# Allegro board FPMemory_1.brd
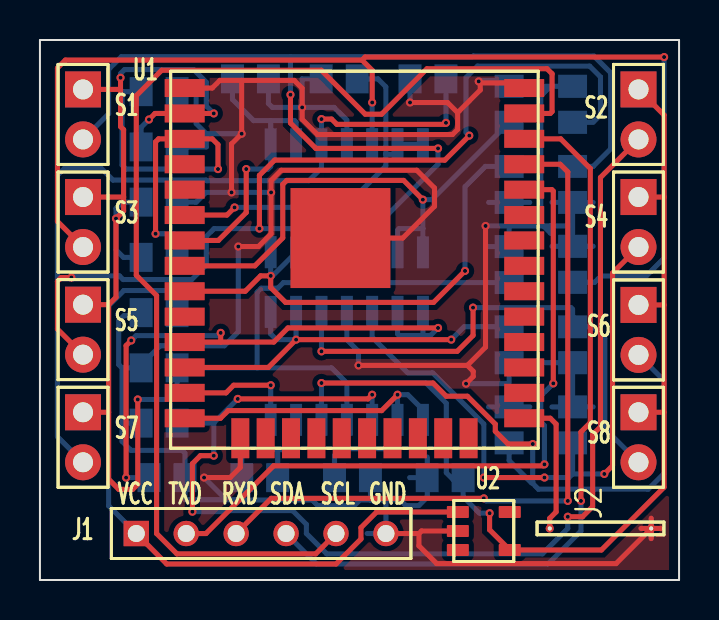
[diagram p0: board, top side]
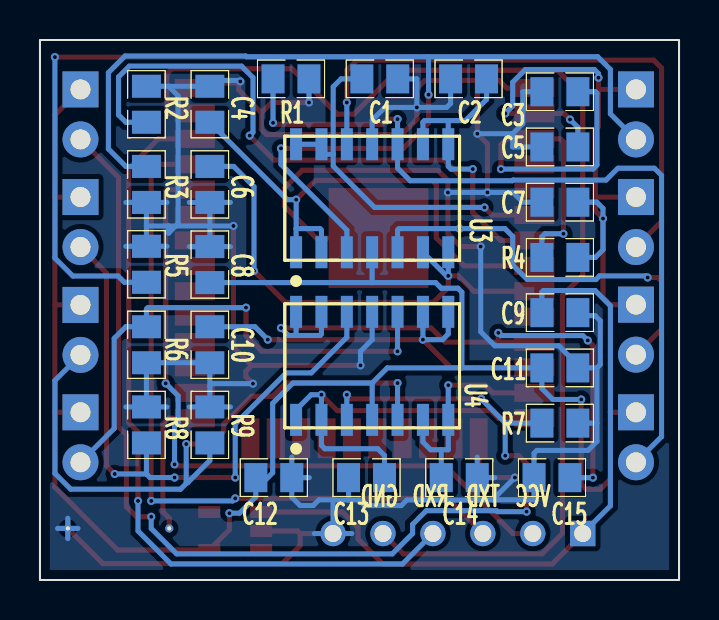
[diagram p1: board, bottom side, seen from below]

Outline 32 x 27 mm; copper layers: TOP, BOTTOM. Coordinates in mm from the lower left corner of the outline.
Outline path: rectangle 0,0 32,27

## Design rules (mm)
constraint set DEFAULT: min track width 0.254, pair gap 0.254

## Placement (name value [footprint] x y rotation side)
C1  0.1uF  [CAP0805]  14.98 25.06 0 bottom
C2  0.1uF  [CAP0805]  10.54 25.06 0 bottom
C3  0.1uF  [CAP0805]  5.97 24.42 180 bottom
C4  0.1uF  [CAP0805]  23.49 23.79 270 bottom
C5  10uF  [CAP0805]  5.97 21.65 180 bottom
C6  0.1uF  [CAP0805]  23.49 19.78 270 bottom
C7  0.1uF  [CAP0805]  5.97 18.89 180 bottom
C8  0.1uF  [CAP0805]  23.49 15.77 90 bottom
C9  1uF  [CAP0805]  5.97 13.37 180 bottom
C10  0.1uF  [CAP0805]  23.49 11.76 270 bottom
C11  2.2uF  [CAP0805]  5.97 10.61 180 bottom
C12  0.1uF  [CAP0805]  20.29 5.12 180 bottom
C13  0.1uF  [CAP0805]  15.65 5.12 180 bottom
C14  0.1uF  [CAP0805]  11 5.12 180 bottom
C15  0.1uF  [CAP0805]  6.36 5.12 180 bottom
J1  UART  [SIP-6]  4.82 2.32 90 top
J2  CON2  [SIP-2S]  25.52 2.58 90 top
R1  50k  [RES0805]  19.43 25.06 180 bottom
R2  50k  [RES0805]  26.67 23.79 270 bottom
R3  50k  [RES0805]  26.67 19.78 270 bottom
R4  10k  [RES0805]  5.97 16.13 180 bottom
R5  50k  [RES0805]  26.67 15.79 90 bottom
R6  50k  [RES0805]  26.67 11.76 270 bottom
R7  50k  [RES0805]  5.97 7.84 180 bottom
R8  50k  [RES0805]  26.67 7.75 90 bottom
R9  50k  [RES0805]  23.49 7.75 270 bottom
S1  IMS-C20B  [SIP-2]  2.16 24.53 0 top
S2  IMS-C20B  [SIP-2]  29.97 24.53 0 top
S3  IMS-C20B  [SIP-2]  2.16 19.15 0 top
S4  IMS-C20B  [SIP-2]  29.97 19.15 0 top
S5  IMS-C20B  [SIP-2]  2.16 13.77 0 top
S6  IMS-C20B  [SIP-2]  29.97 13.75 0 top
S7  IMS-C20B  [SIP-2]  2.16 8.39 0 top
S8  IMS-C20B  [SIP-2]  29.97 8.39 0 top
U1  ESP32  [SMD-38]  15.75 19.09 0 top
U2  TPS70933  [SOT-23]  22.22 2.45 0 top
U3  LM324  [SOIC-14]  15.36 19.09 90 bottom
U4  LM324  [SOIC-14]  15.36 10.71 90 bottom

## Library data of the parts
C1-C15 = CAP NP
J1 = UART
J2 = CON2
R1-R9 = R
S1-S8 = IMS-C20B
U1 = ESP32
U2 = TPS70933
U3 U4 = LM324

## Footprints (pads in the part's own frame, mm; a bottom-side part is the same pattern mirrored in y, then rotated)
CAP0805
  rect 1.15x1.45 smd: 1(-0.9,0) 2(0.9,0)
RES0805
  rect 1.15x1.45 smd: 1(-0.9,0) 2(0.9,0)
SIP-2
  rect 1.8x1.8 hole 1: 1(0,0)
  round 1.8 hole 1: 2(0,-2.5)
SIP-2S
  round 0.406 hole 0.203: 1(0,0) 2(0,-5.08)
SIP-6
  rect 1.27x1.27 hole 0.85: 1(0,0)
  round 1.27 hole 0.85: 2(0,-2.5) 3(0,-5) 4(0,-7.5) 5(0,-10) 6(0,-12.5)
SMD-38
  rect 2x0.9 smd: 1(-8.5,5.51) 2(-8.5,4.24) 3(-8.5,2.97) 4(-8.5,1.7) 5(-8.5,0.43) 6(-8.5,-0.84) 7(-8.5,-2.11) 8(-8.5,-3.38) 9(-8.5,-4.65) 10(-8.5,-5.92) 11(-8.5,-7.19) 12(-8.5,-8.46) 13(-8.5,-9.73) 14(-8.5,-11) 25(8.5,-11) 26(8.5,-9.73) 27(8.5,-8.46) 28(8.5,-7.19) 29(8.5,-5.92) 30(8.5,-4.65) 31(8.5,-3.38) 32(8.5,-2.11) 33(8.5,-0.84) 34(8.5,0.43) 35(8.5,1.7) 36(8.5,2.97) 37(8.5,4.24) 38(8.5,5.51)
  rect 0.9x2 smd: 15(-5.715,-12) 16(-4.445,-12) 17(-3.175,-12) 18(-1.905,-12) 19(-0.635,-12) 20(0.635,-12) 21(1.905,-12) 22(3.175,-12) 23(4.445,-12) 24(5.715,-12)
  rect 5x5 smd: 39(-0.7,-1.99)
SOIC-14
  rect 1.6x0.6 smd: 1(-2.7,3.81) 2(-2.7,2.54) 3(-2.7,1.27) 4(-2.7,0) 5(-2.7,-1.27) 6(-2.7,-2.54) 7(-2.7,-3.81) 8(2.7,-3.81) 9(2.7,-2.54) 10(2.7,-1.27) 11(2.7,0) 12(2.7,1.27) 13(2.7,2.54) 14(2.7,3.81)
SOT-23
  rrect 1.1x0.6 smd: 1(-1.3,0.95) 2(-1.3,0) 3(-1.3,-0.95) 4(1.3,-0.95) 5(1.3,0.95)

## Nets
GND: C1.1 C2.2 C3.1 C4.1 C5.1 C6.2 C7.1 C8.2 C9.2 C10.2 C11.2 C12.2 C13.1 C14.2 C15.1 J1.6 J2.2(P2) R1.2 R2.1 R3.2 R5.2 R6.2 R7.2 R8.2 R9.1 U1.1 U1.15 U1.38 U1.39 U2.2 U3.11 U4.11
VCC: C9.1 J1.1(VCC) U2.1
VDD33: C5.2 C7.2 C8.1 C11.1 C12.1 R4.2 S1.1 S2.1 S3.1 S4.1 S5.1 S6.1 S7.1 S8.1 U1.2 U2.4(OUT) U3.4(VCC) U4.4(VCC)
ADC1_CH4: C4.2 U1.8 U3.1 U3.2
ADC1_CH5: C6.1 U1.9 U3.6 U3.7
ADC1_CH6: C1.2 U1.6 U3.13 U3.14
ADC1_CH7: C2.1 U1.7 U3.8 U3.9
ADC2_CH5: C13.2 U1.14 U4.1 U4.2
ADC2_CH6: C14.1 U1.13 U4.6 U4.7
ADC2_CH7: C10.1 U1.12 U4.8 U4.9
ADC2_CH9: C15.2 U1.11 U4.13 U4.14
RXD: J1.3 U1.35(TXD0)
SCL: J1.5 U1.37
SDA: J1.4 U1.36
TXD: J1.2 U1.34
N01133: R3.1 S1.2(-) U3.3
N02072: R2.2 S5.2(-) U3.5
N02980: R5.1 S3.2(-) U3.12
N03024: R1.1 S7.2(-) U3.10
N05883: C3.2 R4.1 U1.3
N05919: J2.1 U1.25
N44841: R7.1 S2.2(-) U4.3
N44913: R8.1 S4.2(-) U4.12
N45127: R9.2 S6.2(-) U4.5
N45143: R6.1 S8.2(-) U4.10

Pads without a net: U1 4 5 10 16 17 18 19 20 21 22 23 24 26 27 28 29 30 31 32 33; U2 3 5

## Via types
v1: diameter 0.406, hole 0.203, TOP to BOTTOM, 58 vias

## Routing (per net, layer and track width the routed paths; a pad name or vN(x,y) marks a point on that pad's centre or on a via; arc(x,y) is an arc through that point)
GND: length 206.7
  TOP w0.254: U2.2 19.1,2.45 18.98,2.32 ; 22.05,24.85 22.05,24.5 20.91,23.37 ; 22.05,24.85 v1(21.97,24.93) ; 22.05,24.85 23.99,24.85 U1.38 ; v1(21.33,9.82) 21.69,10.18 21.69,10.43 21.4,10.73 ; U1.15 10.03,5.63 9.52,5.12 v1(8.22,5.12) ; v1(15.95,10.73) 21.4,10.73 ; 21.4,10.73 22.31,11.64 v1(22.31,17.7) ; v1(9.93,16.67) 10.94,16.67 11.57,17.31 v1(11.57,19.38) 11.57,19.98 12.08,20.49 18.87,20.49 19.76,19.6 19.76,18.69 18.17,17.1 U1.39 ; 10.1,24.98 9.01,24.98 8.63,24.6 U1.1 ; 10.1,24.98 12.73,24.98 13.13,24.58 v1(13.13,23.63) 13.13,23.04 13.89,22.27 20.66,22.27 20.91,22.53 20.91,23.37 ; 10.1,24.98 v1(10.1,22.31) 9.59,21.81 v1(9.59,19.38) ; J2.2 28.85,0.82 19.86,0.82 18.98,1.71 18.98,2.32 ; J2.2 30.6,2.07 ; J2.2 30.6,3.09 ; J2.2 31.11,2.58 ; J2.2 30.1,2.58 ; v1(18.53,23.87) 20.41,23.87 20.91,23.37 ; 18.98,2.32 J1.6
  BOTTOM w0.254: R9.1 24.52,8.65 ; R9.1 23.49,9.69 ; R9.1 22.46,8.65 ; C14.2 10.1,6.15 ; C14.2 10.1,4.09 10.03,4.01 ; C14.2 9.22,5.12 ; 16.38,2.32 J1.6 ; J1.6 17.32,4.01 ; J1.6 18.26,2.32 ; C13.1 16.55,4 ; 16.55,4 17.32,4 17.32,4.01 ; 16.55,4 16.02,4 15.74,3.72 13.91,3.72 13.63,4 10.04,4 10.03,4.01 ; 17.32,4.01 18.03,4.01 18.32,3.72 18.97,3.72 19.39,4.14 C12.2 ; R1.2 v1(18.53,23.87) ; C5.1 8.33,21.65 8.33,22.31 ; 10.03,4.01 9.33,4.01 ; R8.2 27.7,8.65 ; R8.2 R6.2 C10.2 23.49,9.69 ; R8.2 25.64,8.65 ; 26.67,17.7 R3.2 ; 26.67,17.7 25.56,17.7 ; 26.67,17.7 R5.2 ; R3.2 25.64,18.88 ; R3.2 27.7,18.88 ; C9.2 4.92,13.22 4.2,13.22 3.95,12.96 3.95,10.77 4.11,10.61 ; 4.11,7.84 4.11,10.61 ; 4.11,7.84 R7.2 ; 4.11,7.84 4.11,6.93 4.56,6.48 7.12,6.48 7.26,6.34 C15.1 7.26,4.02 7.27,4.01 9.33,4.01 ; 4.11,10.61 C11.2 5.07,10.76 6.02,11.71 9.23,11.71 9.93,12.41 v1(9.93,16.67) ; 25.64,16.69 R5.2 ; R5.2 27.7,16.69 ; 23.49,9.69 23.37,9.82 v1(21.33,9.82) ; J2.2 30.6,3.09 ; J2.2 30.6,2.07 ; J2.2 31.11,2.58 ; J2.2 30.1,2.58 ; 25.56,17.7 25.56,17.34 25.08,17.82 25.08,24.21 25.56,24.69 ; 25.56,17.7 23.49,17.7 ; 15.36,13.41 15.36,12.02 15.95,11.43 v1(15.95,10.73) ; v1(13.13,23.63) 13.13,25.06 C1.1 ; v1(13.13,23.63) 11.64,23.63 11.44,23.83 C2.2 ; v1(13.13,23.63) 14.73,23.63 15.36,22.99 15.36,21.79 ; C3.1 7.82,24.42 7.82,22.82 8.33,22.31 ; C6.2 24.52,18.88 ; C6.2 23.49,17.7 ; C6.2 22.46,18.88 ; v1(21.97,24.93) 22.02,24.98 23.2,24.98 C4.1 25.56,24.69 ; C8.2 24.52,16.67 ; C8.2 22.46,16.67 ; C8.2 23.49,17.7 ; 9.33,4.01 v1(8.22,5.12) ; v1(11.57,19.38) v1(9.59,19.38) 8.31,19.38 7.82,18.89 C7.1 ; v1(10.1,22.31) 8.33,22.31 ; 23.49,17.7 v1(22.31,17.7) ; C12.2 19.39,6.15 ; C12.2 18.51,5.12 ; 25.56,24.69 R2.1
VCC: length 34.9
  TOP w0.254: J1.1 6.35,0.8 14.82,0.8 16.07,2.05 16.07,2.62 16.86,3.4 U2.1
  BOTTOM w0.254: J1.1 3.44,3.71 3.44,13.71 4.2,14.47 6.79,14.47 6.87,14.4 C9.1
VDD33: length 129.3
  TOP w0.254: 4.19,19.15 S3.1 ; 4.19,19.15 4.19,22.52 4.03,22.67 4.03,24.53 ; 4.19,19.15 4.19,18.45 v1(3.81,18.07) 3.81,14.14 3.44,13.77 ; 3.44,8.39 3.44,13.77 ; 3.44,8.39 S7.1 ; 3.44,8.39 3.44,5.04 3.95,4.53 4.64,4.53 4.9,4.79 v1(4.9,9.03) ; 3.44,13.77 S5.1 ; 31.25,8.39 31.25,4.64 28.11,1.5 U2.4 22.51,2.51 v1(22.51,3.34) ; 31.25,8.39 S8.1 ; 31.25,8.39 31.25,13.75 ; v1(8.7,23.33) U1.2 5.76,23.33 v1(5.46,23.03) ; 31.25,19.15 31.25,13.75 ; 31.25,19.15 S4.1 ; 31.25,19.15 31.25,23.25 S2.1 ; 31.25,13.75 S6.1 ; 4.03,24.53 S1.1 ; 4.03,24.53 v1(4.03,25.11)
  BOTTOM w0.254: C7.2 4.12,18.89 3.81,18.58 v1(3.81,18.07) 3.81,16.51 4.19,16.13 R4.2 ; 15.36,14.87 12.19,14.87 11.91,14.59 11.07,14.59 10.87,14.39 10.87,10.61 ; 15.36,14.87 C8.1 ; 15.36,14.87 U3.4 ; 15.36,9.85 14.61,10.61 10.87,10.61 ; 15.36,9.85 U4.4 ; 15.36,9.85 19.33,9.85 20.35,8.83 20.35,5.36 20.68,5.03 21.19,5.03 ; 10.87,10.61 C11.1 6.87,9.58 6.32,9.03 v1(4.9,9.03) ; v1(5.46,23.03) 5.07,22.63 C5.2 ; v1(8.7,23.33) 8.33,23.7 8.33,24.89 7.7,25.52 4.24,25.52 4.03,25.32 v1(4.03,25.11) ; v1(22.51,3.34) 22.01,3.34 21.19,4.16 21.19,5.03 ; 21.19,5.03 C12.1
ADC1_CH4: length 26.6
  TOP w0.254: U1.8 10.76,15.71 12.16,17.11 12.16,19.78 12.36,19.98 18.21,19.98 v1(19.17,19.02)
  BOTTOM w0.254: 19.17,17.57 v1(19.17,19.02) 19.62,19.02 C4.2 ; 19.17,17.57 19.17,17.57 U3.1 ; 19.17,17.57 17.98,17.57 17.9,17.49 U3.2
ADC1_CH5: length 25.7
  TOP w0.254: v1(21.28,15.46) 19.71,13.88 12.3,13.88 11.55,14.62 v1(11.55,15.21) 11.05,15.21 10.28,14.44 U1.9
  BOTTOM w0.254: v1(21.28,15.46) 21.28,19.66 22.3,20.68 C6.1 ; U3.7 v1(11.55,15.21) 11.64,15.21 U3.6
ADC1_CH6: length 19
  TOP w0.254: v1(9.74,18.63) 9.36,18.25 U1.6
  BOTTOM w0.254: v1(9.74,18.63) 15.25,18.63 17.32,20.7 17.32,21.29 ; 17.32,21.29 17.32,24.66 16.92,25.06 C1.2 ; 17.32,21.29 17.82,21.29 17.9,21.37 17.9,21.79 U3.14
ADC1_CH7: length 15.2
  TOP w0.254: v1(10.33,20.55) 10.33,18.38 8.93,16.98 U1.7
  BOTTOM w0.254: 11.55,22.97 12.75,22.97 12.82,22.89 U3.9 ; 11.55,22.97 U3.8 11.55,20.68 11.42,20.55 v1(10.33,20.55) ; 11.55,22.97 10.7,22.97 9.64,24.03 C2.1
ADC2_CH5: length 20.2
  TOP w0.254: U1.14 9.04,8.09 9.42,8.47 17.11,8.47 v1(17.9,9.26)
  BOTTOM w0.254: C13.2 14.75,6.22 15.09,6.56 17.74,6.56 17.9,6.73 U4.2 v1(17.9,9.26) 18.42,9.26 19.17,8.51 U4.1
ADC2_CH6: length 11.6
  TOP w0.254: v1(11.55,9.74) 9.7,9.74 9.32,9.36 U1.13
  BOTTOM w0.254: 11.9,6.52 12.44,6.52 12.82,6.9 U4.6 ; 11.9,6.52 C14.1 ; 11.9,6.52 11.55,6.52 U4.7 v1(11.55,9.74)
ADC2_CH7: length 21
  TOP w0.254: U1.12 11.44,10.63 v1(12.82,12.02) v1(20.59,12.02)
  BOTTOM w0.254: C10.1 21.24,12.66 v1(20.59,12.02) ; U4.8 11.55,12.3 11.84,12.02 v1(12.82,12.02) U4.9
ADC2_CH9: length 30.7
  TOP w0.254: U1.11 9.05,11.9 ; 9.05,11.9 11.71,11.9 12.42,12.6 v1(19.93,12.6) ; 9.05,11.9 v1(9.05,12.36) ; v1(4.57,11.98) 4.31,11.72 v1(4.31,5.12)
  BOTTOM w0.254: v1(19.93,12.6) 19.56,12.23 19.17,12.23 ; v1(9.05,12.36) 8.91,12.22 4.81,12.22 v1(4.57,11.98) ; 19.17,12.23 17.98,12.23 17.9,12.3 17.9,13.41 ; 19.17,12.23 U4.14 ; C15.2 v1(4.31,5.12)
RXD: length 36.2
  TOP w0.254: J1.3 11.58,4.08 v1(22.22,4.08) ; U1.35 26.05,20.79 26.43,20.41 v1(26.43,3.95)
  BOTTOM w0.254: v1(26.43,3.95) 22.35,3.95 v1(22.22,4.08)
SCL: length 58.8
  TOP w0.254: J1.5 13.81,1.31 6.86,1.31 5.84,2.32 5.84,14.22 4.82,15.24 4.82,24.22 6.09,25.49 14.09,25.49 16.29,23.29 17.11,23.29 19.38,25.56 25.39,25.56 25.64,25.31 25.64,23.42 25.55,23.33 U1.37
SDA: length 38.3
  TOP w0.254: U1.36 26.07,22.06 27.56,20.57 27.56,7.87 27.09,7.4 v1(27.09,3.95)
  BOTTOM w0.254: J1.4 13.85,0.8 25.44,0.8 27.09,2.45 v1(27.09,3.95)
TXD: length 34.8
  TOP w0.254: J1.2 8.31,2.32 11.7,5.71 25.18,5.71 v1(25.26,5.78) ; v1(25.7,9.83) 25.7,19.44 25.63,19.52 U1.34
  BOTTOM w0.254: v1(25.26,5.78) 25.26,7.72 25.08,7.9 25.08,9.21 v1(25.7,9.83)
N01133: length 53.7
  TOP w0.254: v1(12.54,24.26) 12.54,22.85 13.81,21.58 v1(19.93,21.58)
  BOTTOM w0.254: 16.63,16.39 16.63,17.49 19.93,20.79 v1(19.93,21.58) ; S1.2 3.44,23.31 3.44,25.53 4.07,26.16 12.54,26.16 ; R3.1 27.7,20.68 28.57,21.55 28.57,25.36 27.74,26.2 21.69,26.2 21.66,26.16 12.54,26.16 ; 12.54,26.16 v1(12.54,24.26)
N02072: length 48.2
  TOP w0.254: S5.2 0.88,12.55 0.88,14.94 1.06,15.12 v1(1.57,15.12) ; v1(10.99,17.57) 10.99,20.23 11.75,21 20.27,21 v1(21.5,22.22)
  BOTTOM w0.254: 14.09,16.39 14.09,17.49 14.02,17.57 v1(10.99,17.57) 8.72,17.57 8.33,17.18 8.33,15.75 7.6,15.02 4.16,15.02 3.98,15.21 1.66,15.21 v1(1.57,15.12) ; v1(21.5,22.22) 21.33,22.38 21.33,25.12 21.9,25.69 27.53,25.69 28.06,25.15 28.06,23.25 27.7,22.89 R2.2
N02980: length 59.6
  TOP w0.254: S3.2 0.88,17.93 0.88,25.6 1.27,26 16.13,26 ; 16.13,26 16.28,26.15 v1(31.25,26.15) ; 16.13,26 16.63,25.49 v1(16.63,23.87)
  BOTTOM w0.254: v1(31.25,26.15) 31.25,16.1 30.36,15.2 28.09,15.2 27.77,14.89 R5.1 ; U3.12 v1(16.63,23.87)
N03024: length 39.8
  TOP w0.254: v1(20.33,22.86) 20.25,22.78 14.87,22.78 14.6,23.05 v1(14.09,23.05)
  BOTTOM w0.254: v1(14.09,23.05) U3.10 14.09,20.6 13.46,19.96 8.35,19.96 8.31,20 3.65,20 3.06,20.59 1.23,20.59 0.88,20.23 0.88,7.17 S7.2 ; R1.1 v1(20.33,22.86)
N05883: length 20.8
  TOP w0.254: v1(8.92,20.55) 8.92,21.77 8.63,22.06 U1.3 5.94,22.06 5.79,21.91 v1(5.79,17.31)
  BOTTOM w0.254: C3.2 4.19,24.42 4.11,24.34 4.11,20.75 4.31,20.55 v1(8.92,20.55) ; R4.1 6.87,17.16 6.71,17.31 v1(5.79,17.31)
N05919: length 7.1
  TOP w0.254: J2.1 25.52,3.09 25.84,3.4 25.84,7.8 25.55,8.09 U1.25
N44841: length 58.7
  TOP w0.254: v1(26.43,3.16) 27.16,3.16 27.67,3.67 27.67,7.27 28.06,7.66 28.06,20.12 S2.2 ; v1(9.9,9.06) 16.43,9.06 v1(16.63,9.26) ; v1(8.7,6.22) 8.03,6.22 7.63,5.82 v1(7.63,3.42)
  BOTTOM w0.254: v1(9.9,9.06) 8.7,7.85 8.7,7.84 ; v1(7.63,3.42) 9.09,3.42 9.14,3.47 12.65,3.47 13.34,2.78 13.34,2.32 14.36,1.31 25.16,1.31 26.43,2.58 v1(26.43,3.16) ; R7.1 8.7,7.84 ; 8.7,7.84 v1(8.7,6.22) ; 16.63,8.01 v1(16.63,9.26)
N44913: length 31
  TOP w0.254: v1(22.22,5.12) v1(25.26,5.12) ; S4.2 28.67,15.35 28.67,5.72 v1(28.26,5.3)
  BOTTOM w0.254: 26.67,5.3 26.49,5.12 v1(25.26,5.12) ; 26.67,5.3 v1(28.26,5.3) ; 26.67,5.3 R8.1 ; v1(22.22,5.12) 22.22,7.8 19.67,10.36 18.41,10.36 16.63,12.13 U4.12
N45127: length 31.9
  TOP w0.254: v1(24.68,6.8) 23.44,6.8 22.8,7.43 22.8,7.79 21.4,9.19 20.34,9.19 19.68,9.85 v1(14.09,9.85)
  BOTTOM w0.254: R9.2 23.49,5.97 24.6,4.86 24.64,4.86 ; 14.09,8.01 v1(14.09,9.85) ; 24.64,4.86 24.96,4.54 30.46,4.54 31.25,5.33 31.25,9.97 S6.2 ; 24.64,4.86 24.68,4.9 v1(24.68,6.8)
N45143: length 25.9
  TOP w0.254: v1(14.09,11.43) 20.89,11.43 21.68,12.23 v1(21.68,13.62)
  BOTTOM w0.254: U4.10 v1(14.09,11.43) ; v1(21.68,13.62) 26.59,13.62 26.67,13.54 R6.1 27.7,12.66 28.28,12.08 28.28,7.57 S8.2

## Copper pours and planes (outline as drawn; the poured copper is in the pictures)
GND on TOP: 0.5,26.5 31.5,26.5 31.5,0.5 0.5,0.5 ; 28 cut-outs
GND on BOTTOM: 0.5,26.5 31.5,26.5 31.5,0.5 0.5,0.5 ; 23 cut-outs

## Text on the board
Ref Des/Silkscreen Bottom: VCC | TXD | RXD | GND
Ref Des/Silkscreen Top: VCC | TXD | RXD | SDA | SCL | GND | U2
NCLEGEND-1-2: FIGURE | FINISHED_SIZE | 39.37 | 8.0 | DRILL CHART: TOP to BOTTOM | ALL UNITS ARE IN MILS | PLATED | QTY | 20 | 50
